# EAGLE board Sample End Effector (EAGLE 7.0.0)
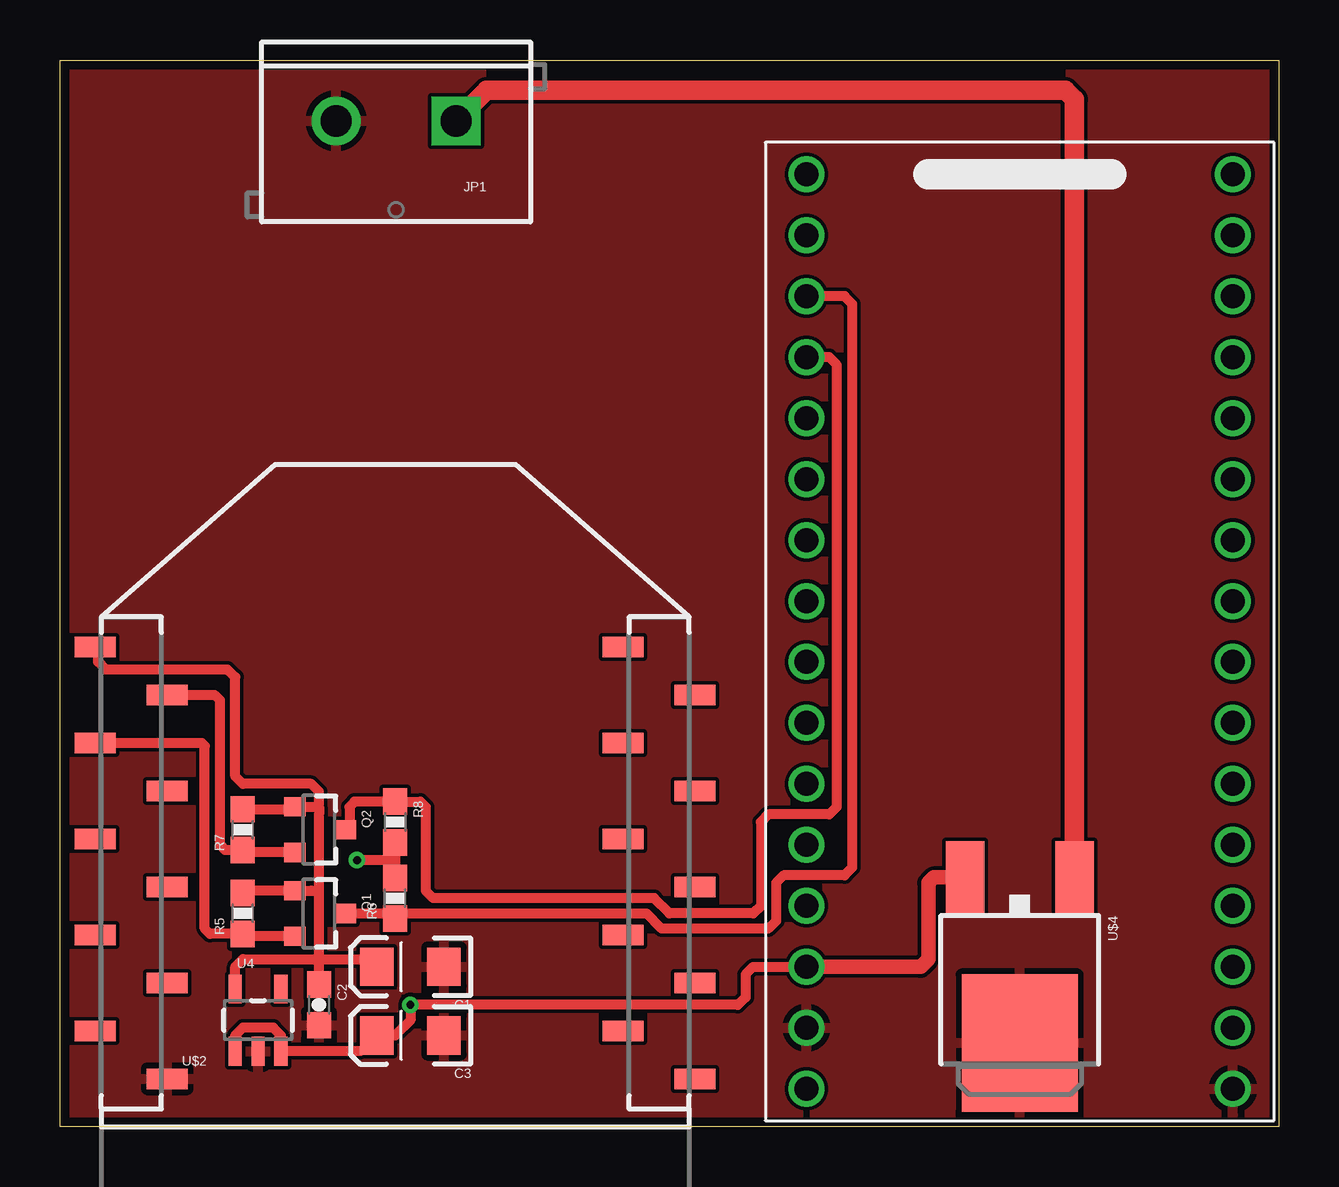
[diagram p0: board, top side]
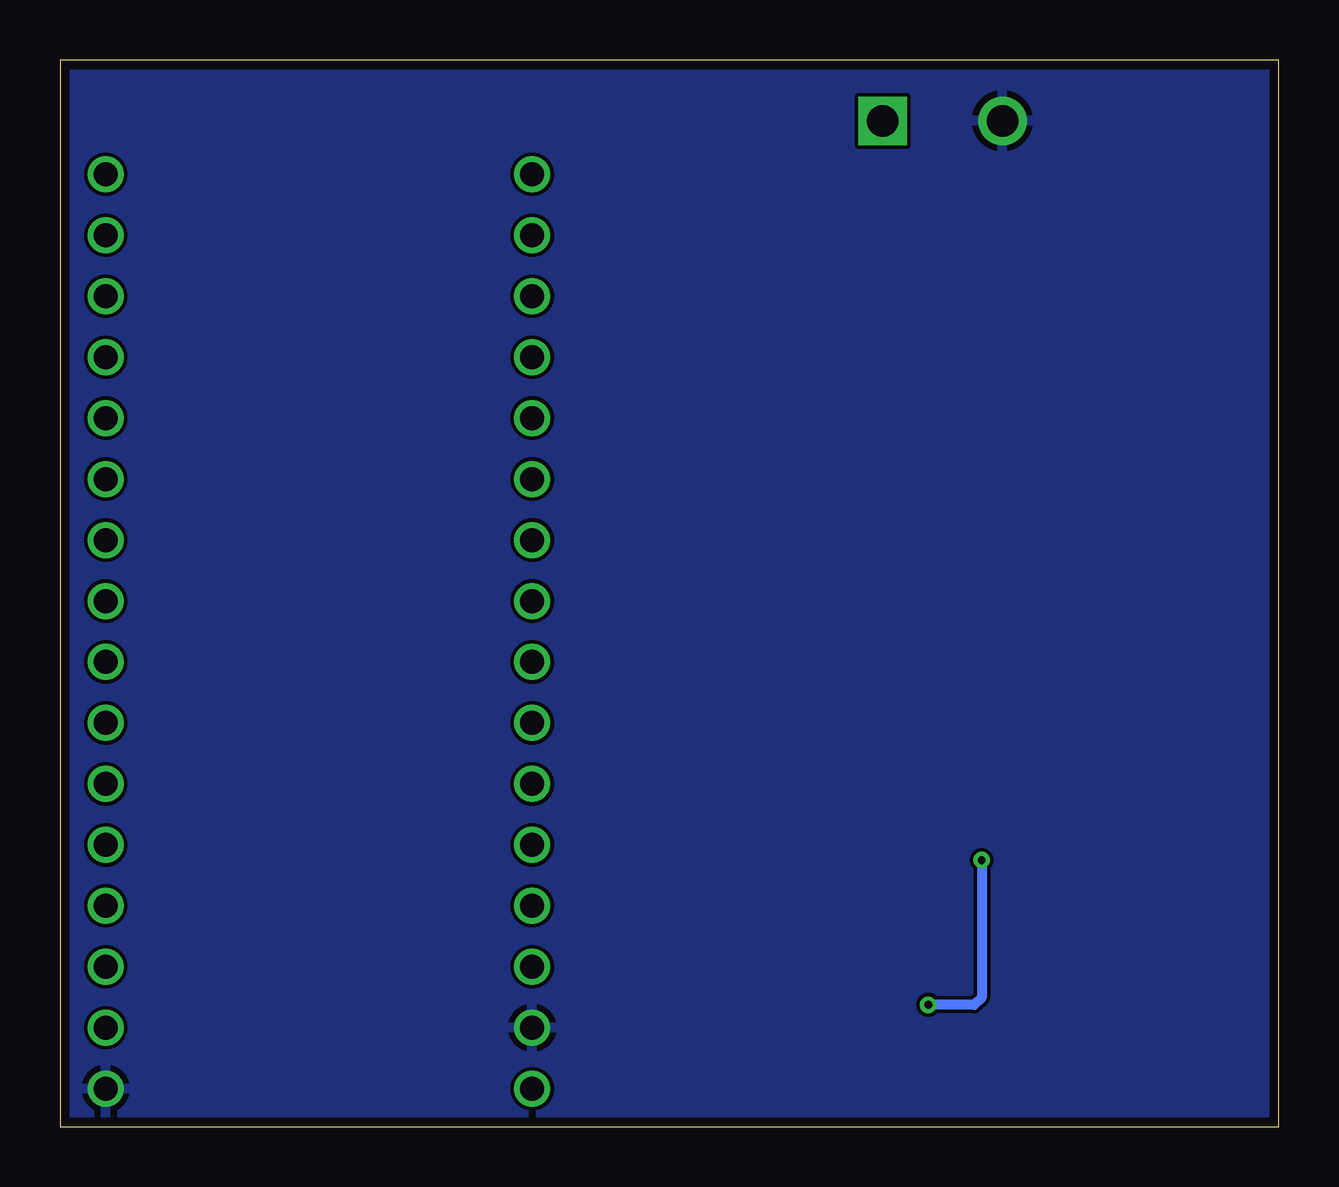
[diagram p1: board, bottom side, seen from below]

Size 50.8 x 44.45 mm. Coordinates in mm from the lower left corner, seen from the top.
Outline: 0,0 0,44.45 50.8,44.45 50.8,0 0,0
Copper layers (1*16): Top 0.0356mm / dielectric 1.5011mm / Bottom 0.0356mm
Design rules "LaenPCBOrder": minimum track width 6mil, minimum drill 13mil, track to track 6mil, track to pad 6mil, pad to pad 6mil, via to via 6mil, smd to smd 6mil, copper to edge 15mil, drill to drill 6mil, minimum pad ring 7mil, minimum via ring 7mil, stop-mask expansion 3mil, vias tented up to drill 0mil, thermal gap 10mil
Net classes: 0 default: width 0.203 mm

## Footprints (pad centres in the part's own frame; a part is rotated, then mirrored left to right if it is on the bottom)
EIA3216 = smd 1.4 x 1.6: A 1.4,0; C -1.4,0
0603-CAP = smd 1.1 x 1: 1 -0.85,0; 2 0.85,0
SCREWTERMINAL-5MM-2 = drill 1.3 pad 2.032 square: 1 0,0 | drill 1.3 pad 2.032: 2 5,0
SOT23-3 = smd 0.8 x 0.9: 1 -0.95,-1; 2 0.95,-1; 3 0,1.1
0603-RES = smd 1.1 x 1: 1 -0.85,0; 2 0.85,0
SOT23-5 = smd 0.55 x 1.2: 1 -0.95,-1.3; 2 0,-1.3; 3 0.95,-1.3; 4 0.95,1.3; 5 -0.95,1.3
DIP = drill 1: 1 -8.89,19.05; 2 -8.89,16.51; 3 -8.89,13.97; 4 -8.89,11.43; 5 -8.89,8.89; 6 -8.89,6.35; 7 -8.89,3.81; 8 -8.89,1.27; 9 -8.89,-1.27; 10 -8.89,-3.81; 11 -8.89,-6.35; 12 -8.89,-8.89; 13 -8.89,-11.43; 14 -8.89,-13.97; 15 -8.89,-16.51; 16 -8.89,-19.05; 17 8.89,-19.05; 18 8.89,-16.51; 19 8.89,-13.97; 20 8.89,-11.43; 21 8.89,-8.89; 22 8.89,-6.35; 23 8.89,-3.81; 24 8.89,-1.27; 25 8.89,1.27; 26 8.89,3.81; 27 8.89,6.35; 28 8.89,8.89; 29 8.89,11.43; 30 8.89,13.97; 31 8.89,16.51; 32 8.89,19.05
XBEE-SMD = smd 1.7 x 0.85: 1 -12.5,20; 2 -9.5,18; 3 -12.5,16; 4 -9.5,14; 5 -12.5,12; 6 -9.5,10; 7 -12.5,8; 8 -9.5,6; 9 -12.5,4; 10 -9.5,2; 11 12.5,2; 12 9.5,4; 13 12.5,6; 14 9.5,8; 15 12.5,10; 16 9.5,12; 17 12.5,14; 18 9.5,16; 19 12.5,18; 20 9.5,20
DPAK = smd 1.6 x 3: 1 -2.28,-5.31; 3 2.28,-5.31 | smd 4.826 x 5.715: 4 0,1.588

## Placement (x,y rotation side)
C1  10uF  [EIA3216]  14.61,6.67 180 top
C2  0.1uF  [0603-CAP]  10.79,5.08 270 top
C3  10uF  [EIA3216]  14.61,3.81 180 top
JP1  M025MM  [SCREWTERMINAL-5MM-2]  16.51,41.91 180 top
Q1  MOSFET-NCHANNELSMD  [SOT23-3]  10.79,8.89 270 top
Q2  MOSFET-NCHANNELSMD  [SOT23-3]  10.79,12.38 270 top
R5  1k  [0603-RES]  7.62,8.89 90 top
R6  1k  [0603-RES]  13.97,9.53 90 top
R7  1k  [0603-RES]  7.62,12.38 90 top
R8  1k  [0603-RES]  13.97,12.7 270 top
U4  V_REG_LDOSMD  [SOT23-5]  8.26,4.45 0 top
U$1  32U4  [DIP]  40.01,20.64 0 top
U$2  XBEE-1B3  [XBEE-SMD]  13.97,0 0 top
U$4  LM2931_FIXED  [DPAK]  40.01,5.08 180 top

## Library data of the parts
C1 C3 = SparkFun
C2 = SparkFun-Capacitors; PROD_ID: CAP-00810
JP1 = SparkFun-Connectors
Q1 Q2 = SparkFun-DiscreteSemi
R5-R8 = SparkFun-Resistors; PROD_ID: RES-07856
U4 U$4 = SparkFun-PowerIC
U$1 = 32U4
U$2 = SparkFun-RF; PROD_ID: CONN-09042

## Nets
3.3V: C1.A C2.1 Q1.1 Q2.1 R5.2 R7.2 U4.5 U$2.1
5V: C3.A R6.2 R8.2 U4.1 U4.3 U$1.14 U$4.3
12V: JP1.1 U$4.1
DIN: Q1.2 R5.1 U$2.3
DOUT: Q2.2 R7.1 U$2.2
GND: C1.C C2.2 C3.C JP1.2 U4.2 U$1.15 U$1.17 U$2.10 U$4.4
RX: Q2.3 R8.1 U$1.4
TX: Q1.3 R6.1 U$1.3

## Tracks (layer width: path | path; a pad name or v marks a point on that pad's centre or on a via)
3.3V
  Top 0.406: R5.2 7.72,9.84 Q1.1 10.47,9.84 10.79,9.84 | R7.2 9.38,13.23 Q2.1 10.8,13.33 | 10.79,9.84 10.79,13.02 10.8,13.33 | U4.5 7.3,6.67 7.62,6.99 10.79,6.99 | C2.1 10.79,6.99 | 10.79,6.99 12.57,6.99 C1.A | 10.79,6.99 10.79,9.84 | 2.11,20 2.1,20 U$2.1 1.59,19.88 1.59,19.37 1.91,19.05 6.99,19.05 7.3,18.73 7.3,14.61 7.62,14.29 10.48,14.29 10.8,13.97 10.8,13.33
5V  (via drill 0.33)
  Top 0.406: R8.2 13.97,11.11 | 13.97,11.11 v12.38,11.11 | 13.65,3.68 C3.A | 13.97,11.11 R6.2 | U4.1 7.3,3.81 7.62,4.13 8.89,4.13 9.21,3.81 9.21,3.18 | 9.21,3.18 U4.3 9.23,3.17 | U$1.14 28.89,6.67 28.57,6.35 28.57,5.4 28.26,5.08 v14.61,5.08 14.61,4.45 13.97,3.81 C3.A | 9.21,3.18 9.21,3.17 12.57,3.17 C3.A
  Top 0.61: U$4.3 36.42,10.39 36.2,10.16 36.2,6.99 35.88,6.67 U$1.14
  Bottom 0.406: v12.38,11.11 12.38,5.4 12.7,5.08 v14.61,5.08
12V
  Top 0.813: U$4.1 42.28,42.8 41.91,43.18 17.78,43.18 JP1.1
DIN
  Top 0.406: Q1.2 7.72,7.94 R5.1 6.25,8.04 6.03,8.26 6.03,15.88 5.91,16 U$2.3
DOUT
  Top 0.406: Q2.2 7.72,11.43 R7.1 6.88,11.53 6.67,11.75 6.67,17.78 6.45,18 U$2.2
GND
  pour Bottom: -12.7,57.15 -12.7,-12.7 63.5,-12.7 63.5,57.15
  pour Top: -15.24,54.61 -15.24,-15.24 60.96,-15.24 60.96,54.61
RX
  Top 0.406: U$1.4 32.07,32.07 32.38,31.75 32.38,13.34 32.07,13.02 29.53,13.02 29.21,12.7 29.21,9.21 28.89,8.89 25.4,8.89 24.77,9.53 15.56,9.53 15.24,9.84 15.24,13.34 15.03,13.55 R8.1 12.28,13.55 12.06,13.34 12.06,12.55 Q2.3
TX
  Top 0.406: U$1.3 32.7,34.61 33.02,34.29 33.02,10.79 32.7,10.48 30.16,10.48 29.84,10.16 29.84,8.57 29.53,8.26 25.08,8.26 24.45,8.89 14.19,8.89 R6.1 13.76,8.89 Q1.3